# EAGLE board osi-blink_rev_0 (EAGLE 6.3)
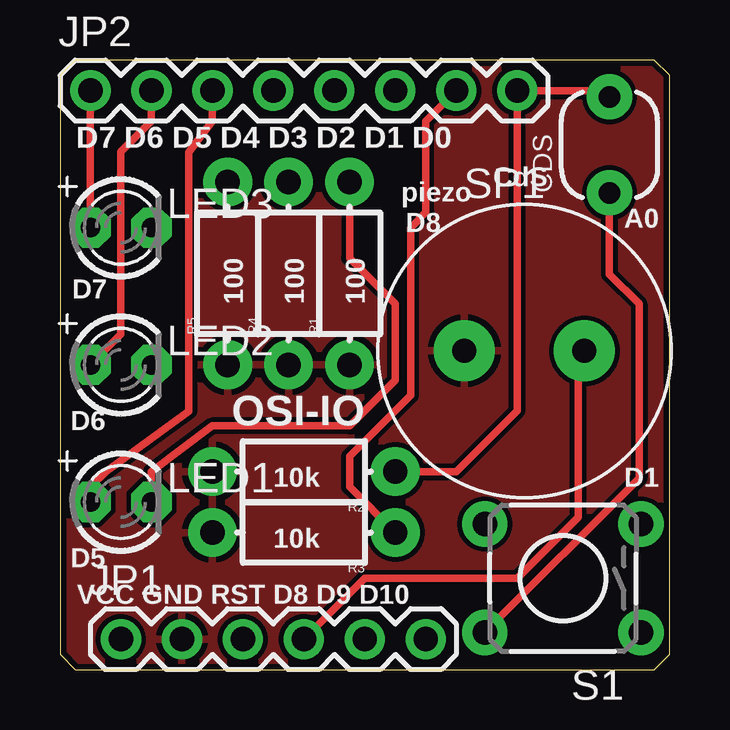
[diagram p0: board, top side]
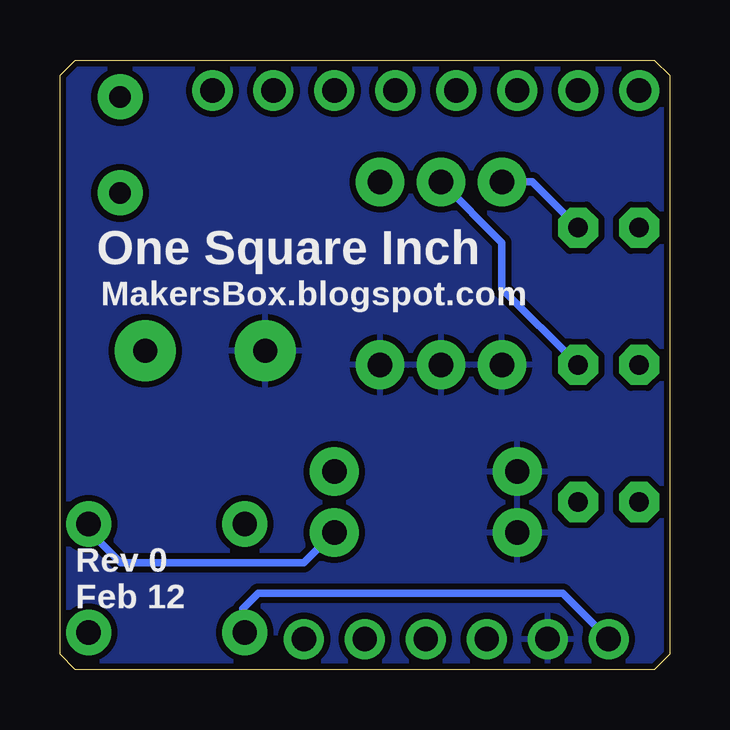
[diagram p1: board, bottom side, seen from below]

Size 25.4 x 25.4 mm. Coordinates in mm from the lower left corner, seen from the top.
Outline: 0,24.77 0.64,25.4 24.77,25.4 24.77,25.4 25.4,24.77 25.4,0.64 24.77,0 24.77,0 0.64,0 0,0.64 0,24.77
Outline: 0,24.77 0,24.77
Copper layers (1*16): Top 0.035mm / dielectric 1.5mm / Bottom 0.035mm
Design rules "SparkFun": minimum track width 8mil, minimum drill 20mil, track to track 8mil, track to pad 8mil, pad to pad 8mil, via to via 8mil, smd to smd 8mil, copper to edge 10mil, drill to drill 8mil, minimum pad ring 12mil, minimum via ring 10mil, stop-mask expansion 4mil, vias tented up to drill 25mil, thermal gap 10mil

## Footprints (pad centres in the part's own frame; a part is rotated, then mirrored left to right if it is on the bottom)
PHOTOCELL-KIT = drill 0.9 pad 1.88: 1 -2,0; 2 2,0
1X06 = drill 1.016 pad 1.676: 1 0,0; 2 2.54,0; 3 5.08,0; 4 7.62,0; 5 10.16,0; 6 12.7,0
1X08 = drill 1.016 pad 1.676: 1 0,0; 2 2.54,0; 3 5.08,0; 4 7.62,0; 5 10.16,0; 6 12.7,0; 7 15.24,0; 8 17.78,0
LED3MM = drill 0.813 pad 1.676 octagon: A -1.27,0; K 1.27,0
AXIAL-0.3-KIT = drill 1.016 pad 2.032: P$1 -3.81,0; P$2 3.81,0
TACTILE-PTH = drill 1.016 pad 1.88: 1 -3.251,2.261; 2 3.251,2.261; 3 -3.251,-2.261; 4 3.251,-2.261
PS12 = drill 1 pad 2.54: P$1 -2.5,0; P$2 2.5,0

## Placement (x,y rotation side)
CDS  PHOTOCELLPTH-KIT  [PHOTOCELL-KIT]  22.9,21.87 90 top
JP1  [1X06]  2.54,1.27 0 top
JP2  [1X08]  1.27,24.13 0 top
LED1  [LED3MM]  2.54,6.99 0 top
LED2  [LED3MM]  2.54,12.7 0 top
LED3  [LED3MM]  2.54,18.41 0 top
R1  [AXIAL-0.3-KIT]  12.06,16.51 90 top
R2  [AXIAL-0.3-KIT]  10.16,8.26 180 top
R3  [AXIAL-0.3-KIT]  10.16,5.71 180 top
R4  [AXIAL-0.3-KIT]  9.53,16.51 90 top
R5  [AXIAL-0.3-KIT]  6.99,16.51 90 top
S1  [TACTILE-PTH]  20.95,3.81 180 top
SP1  SPEAKER/PS12  [PS12]  19.35,13.28 0 top

## Library data of the parts
CDS JP1 JP2 R1-R5 S1 = SparkFun_mod
LED1-LED3 = adafruit
SP1 = adafruit_mod

## Nets
D0: CDS.2 JP2.8 R2.P$1
D1: JP2.7 R3.P$1 S1.3
D2: JP2.6
D3: JP2.5
D4: JP2.4
D5: JP2.3 LED1.A
D6: JP2.2 LED2.A
D7: JP2.1 LED3.A
D8: JP1.4 SP1.P$2
D9: JP1.5
D10: JP1.6
GND: JP1.2 R1.P$1 R2.P$2 R3.P$2 R4.P$1 R5.P$1 SP1.P$1
N$1: LED1.K R1.P$2
N$2: LED2.K R4.P$2
N$3: LED3.K R5.P$2
RESET: JP1.3
VCC: CDS.1 JP1.1 S1.2

## Tracks (layer width: path | path; a pad name or v marks a point on that pad's centre or on a via)
D0
  Top 0.305: R2.P$1 16.51,8.26 19.05,10.79 JP2.8 22.63,24.13 CDS.2
D1
  Top 0.305: R3.P$1 12.06,7.62 12.06,8.89 14.61,11.43 14.61,18.41 15.24,19.05 15.24,22.86 JP2.7
  Bottom 0.305: S1.3 24.21,5.79 22.86,4.45 15.24,4.45 R3.P$1
D5
  Top 0.305: JP2.3 6.35,22.86 5.37,21.57 5.37,10.77 1.91,8.26 1.27,7.62 LED1.A
D6
  Top 0.305: JP2.2 3.81,22.86 2.54,21.59 2.54,13.97 LED2.A
D7
  Top 0.305: JP2.1 LED3.A
D8
  Top 0.305: JP1.4 12.7,3.81 19.05,3.81 21.59,6.35 21.59,13.02 SP1.P$2
GND
  pour Bottom (isolate 0.254): -1.27,26.67 26.67,26.67 26.67,-1.27 -1.27,-1.27
  pour Top: -0.64,26.04 26.67,26.04 26.67,0 26.04,-0.64 -0.64,-0.64
N$1
  Top 0.305: R1.P$2 12.06,17.14 13.97,15.24 13.97,12.06 12.06,10.16 6.35,10.16 3.81,8.26 LED1.K
N$2
  Bottom 0.305: R4.P$2 6.99,17.78 6.99,15.88 LED2.K
N$3
  Bottom 0.305: R5.P$2 5.71,20.32 LED3.K
VCC
  Top 0.305: CDS.1 22.9,16.47 24.13,15.24 24.13,7.98 S1.2
  Bottom 0.305: JP1.1 4.45,3.17 17.14,3.17 17.78,2.54 17.78,1.63 S1.2

## Text on the board
tPlace: D7 D6 D5 D4 D3 D2 D1 D0 | CdS | piezo | D8 | A0 | D7 | 100 | 100 | 100 | D6 | OSI-IO | 10k | D1 | D5 | 10k | VCC GND RST D8 D9 D10
bPlace: One Square Inch | MakersBox.blogspot.com | Rev 0 / Feb 12